# EAGLE board SoundCard-OSC (EAGLE 7.2.0)
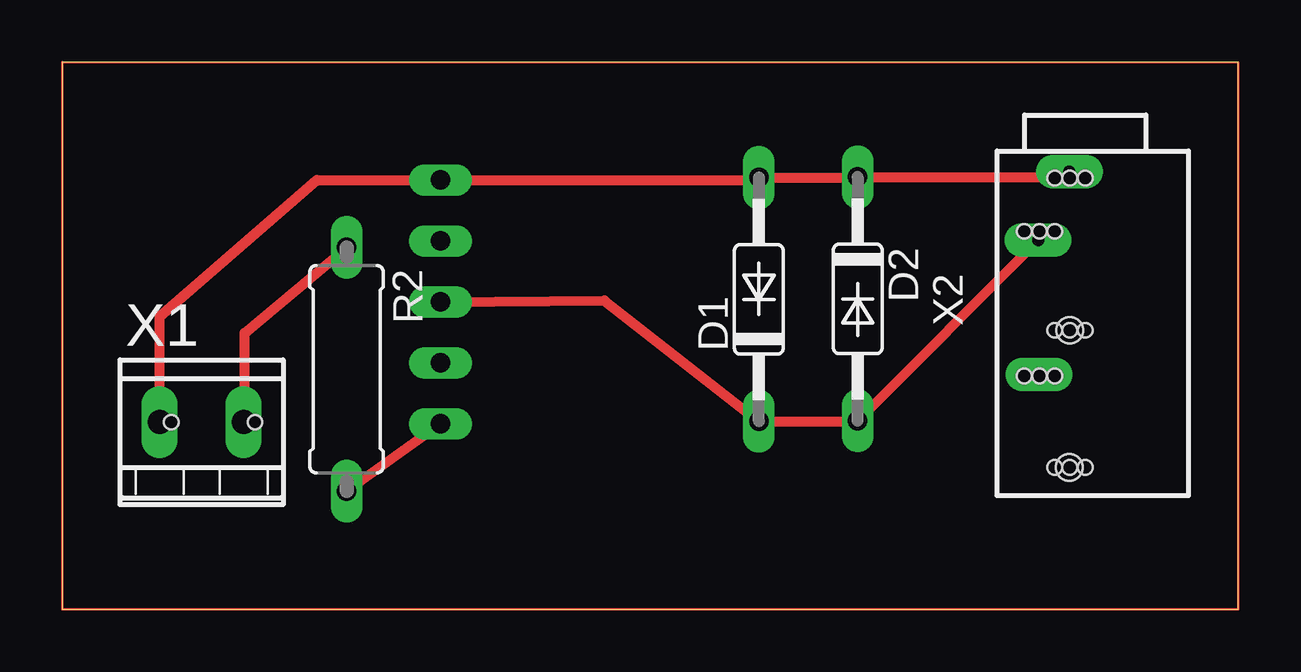
[diagram p0: board, top side]
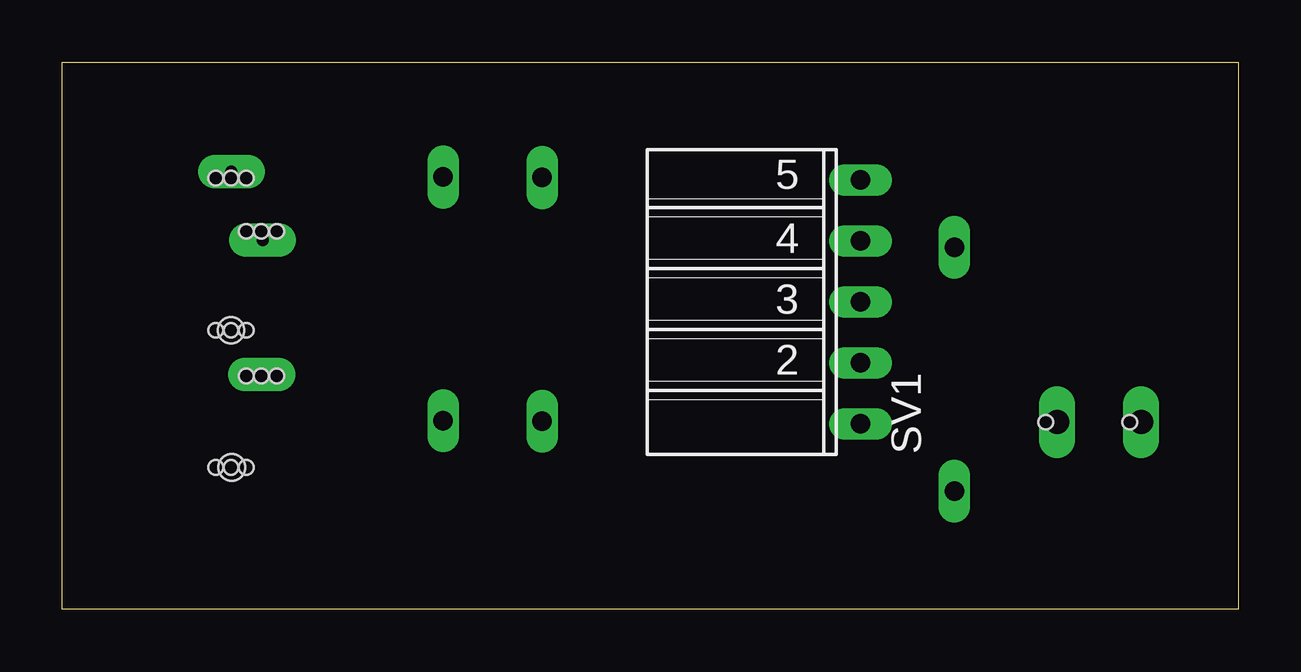
[diagram p1: board, bottom side, seen from below]

Size 49 x 22.8 mm. Coordinates in mm from the lower left corner, seen from the top.
Outline: 0,0 49,0 49,22.8 0,22.8 0,0
Copper layers (1*16): Top 0.035mm / dielectric 1.5mm / Bottom 0.035mm
Design rules "default": minimum track width 10mil, minimum drill 24mil, track to track 8mil, track to pad 8mil, pad to pad 8mil, via to via 8mil, smd to smd 8mil, copper to edge 40mil, drill to drill 8mil, minimum pad ring 10mil, minimum via ring 8mil, stop-mask expansion 4mil, vias tented up to drill 0mil, thermal gap 10mil
Net classes: 0 default: clearance 0.205 mm

## Footprints (pad centres in the part's own frame; a part is rotated, then mirrored left to right if it is on the bottom)
DO35-10 = drill 0.813 long: A 5.08,0; C -5.08,0
0309/10 = drill 0.813 long: 1 -5.08,0; 2 5.08,0
FE05W = drill 0.813 long: 1 -5.08,0; 2 -2.54,0; 3 0,0; 4 2.54,0; 5 5.08,0
AK550/2 = drill 1 pad 1.5 long: 1 -1.75,0; 2 1.75,0 | hole 0.6: -1.27,0; 2.223,0
1501_03 = drill 0.5 pad 1.397 long: 1 -2.558,1.532; 2 -3.865,-1.317; 3 -3.825,-6.93 | hole 1.1: -2.54,-5.08; -2.572,-10.795 | hole 0.6: -2.54,-5.08; -2.54,-10.795; -1.905,-5.08; -3.175,-5.08; -1.905,-10.795; -3.175,-10.795; -4.445,-6.985; -1.905,1.27; -3.175,1.27; -3.175,-0.953; -4.445,-0.953; -3.175,-6.985; -3.81,-0.953; -3.81,-0.953; -2.54,1.27; -3.81,-6.985

## Placement (x,y rotation side)
D1  1N4148DO35-10  [DO35-10]  29.02,12.92 90 top
D2  1N4148DO35-10  [DO35-10]  33.14,12.94 270 top
R2  4.7K  [0309/10]  11.84,10.01 270 top
SV1  [FE05W]  15.75,12.81 90 bottom
X1  AK550/2  [AK550/2]  5.8,7.8 0 top
X2  1501_03  [1501_03]  44.52,16.71 0 top

## Library data of the parts
D1 D2 = diode
R2 = resistor
SV1 = con-lsta; OC_FARNELL: unknown; OC_NEWARK: unknown
X1 = con-ptr500_modified; OC_FARNELL: unknown; OC_NEWARK: unknown
X2 = con-lumberg_modified; OC_FARNELL: 1200127; OC_NEWARK: unknown

## Nets
GND: D1.A D2.C SV1.5 X1.1 X2.1
N$1: R2.1 X1.2
N$3: R2.2 SV1.1
VADJ: D1.C D2.A SV1.3 X2.2

## Tracks (layer width: path | path; a pad name or v marks a point on that pad's centre or on a via)
GND
  Top 0.1: X1.1 4.06,7.8
  Top 0.406: 29.02,17.83 D1.A | D1.A 28.91,17.89 SV1.5 10.61,17.9 4.06,12.2 4.06,7.8 | D1.A 33.12,18 D2.C 41.98,18.02 X2.1
N$1
  Top 0.1: X1.2 7.6,7.8
  Top 0.406: R2.1 7.6,11.52 7.6,7.8
N$2
  Top 0.1: 0,22.8 0,0 49,0 49,22.8 0.01,22.8
N$3
  Top 0.406: R2.2 SV1.1
VADJ
  Top 0.406: X2.2 D2.A 33.12,7.84 D1.C 22.58,12.88 SV1.3